# Altium PCB StationSolPortative.PcbDoc
Units mil, origin at the board's own origin, x right, y up, seen from the top; angles counter-clockwise.
Board outline 7255 x 4700 mil, 2 copper layers (Top Layer, Bottom Layer); 46 components, 53 nets, 270 pads, 23 vias.
Unrouted connection lines stored in the file: 8.
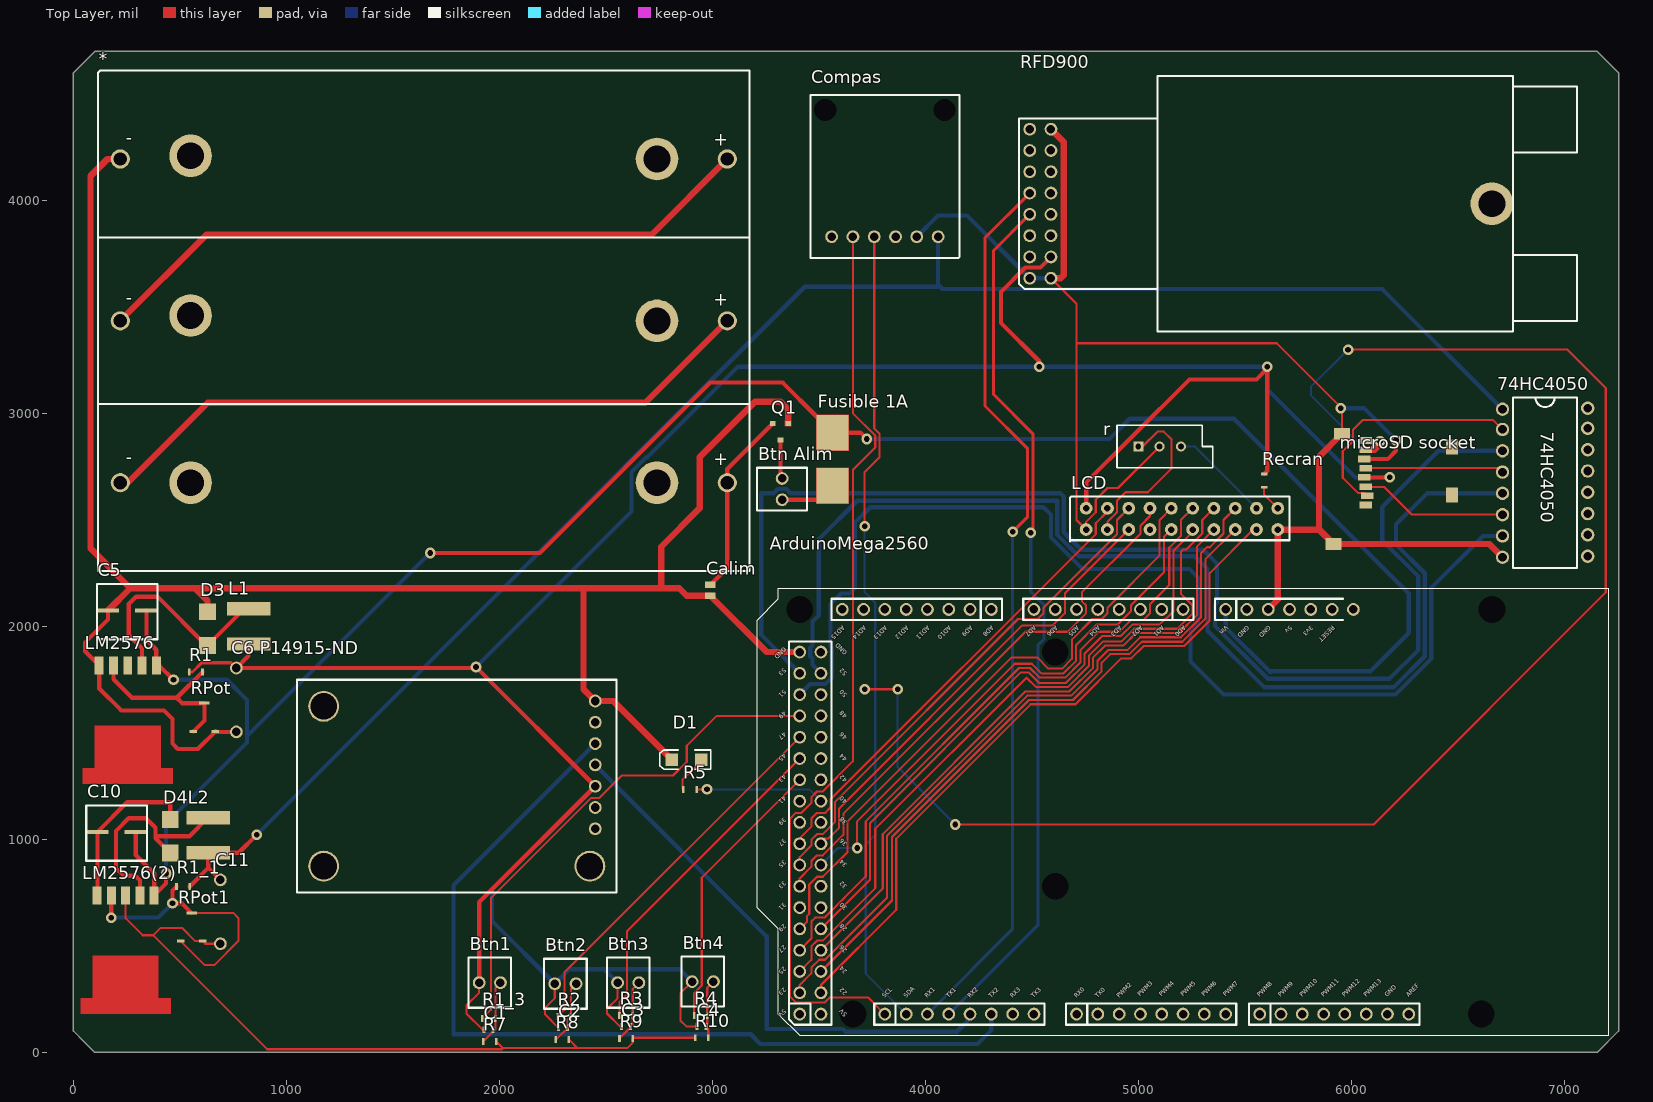
[diagram p0: Top Layer view]
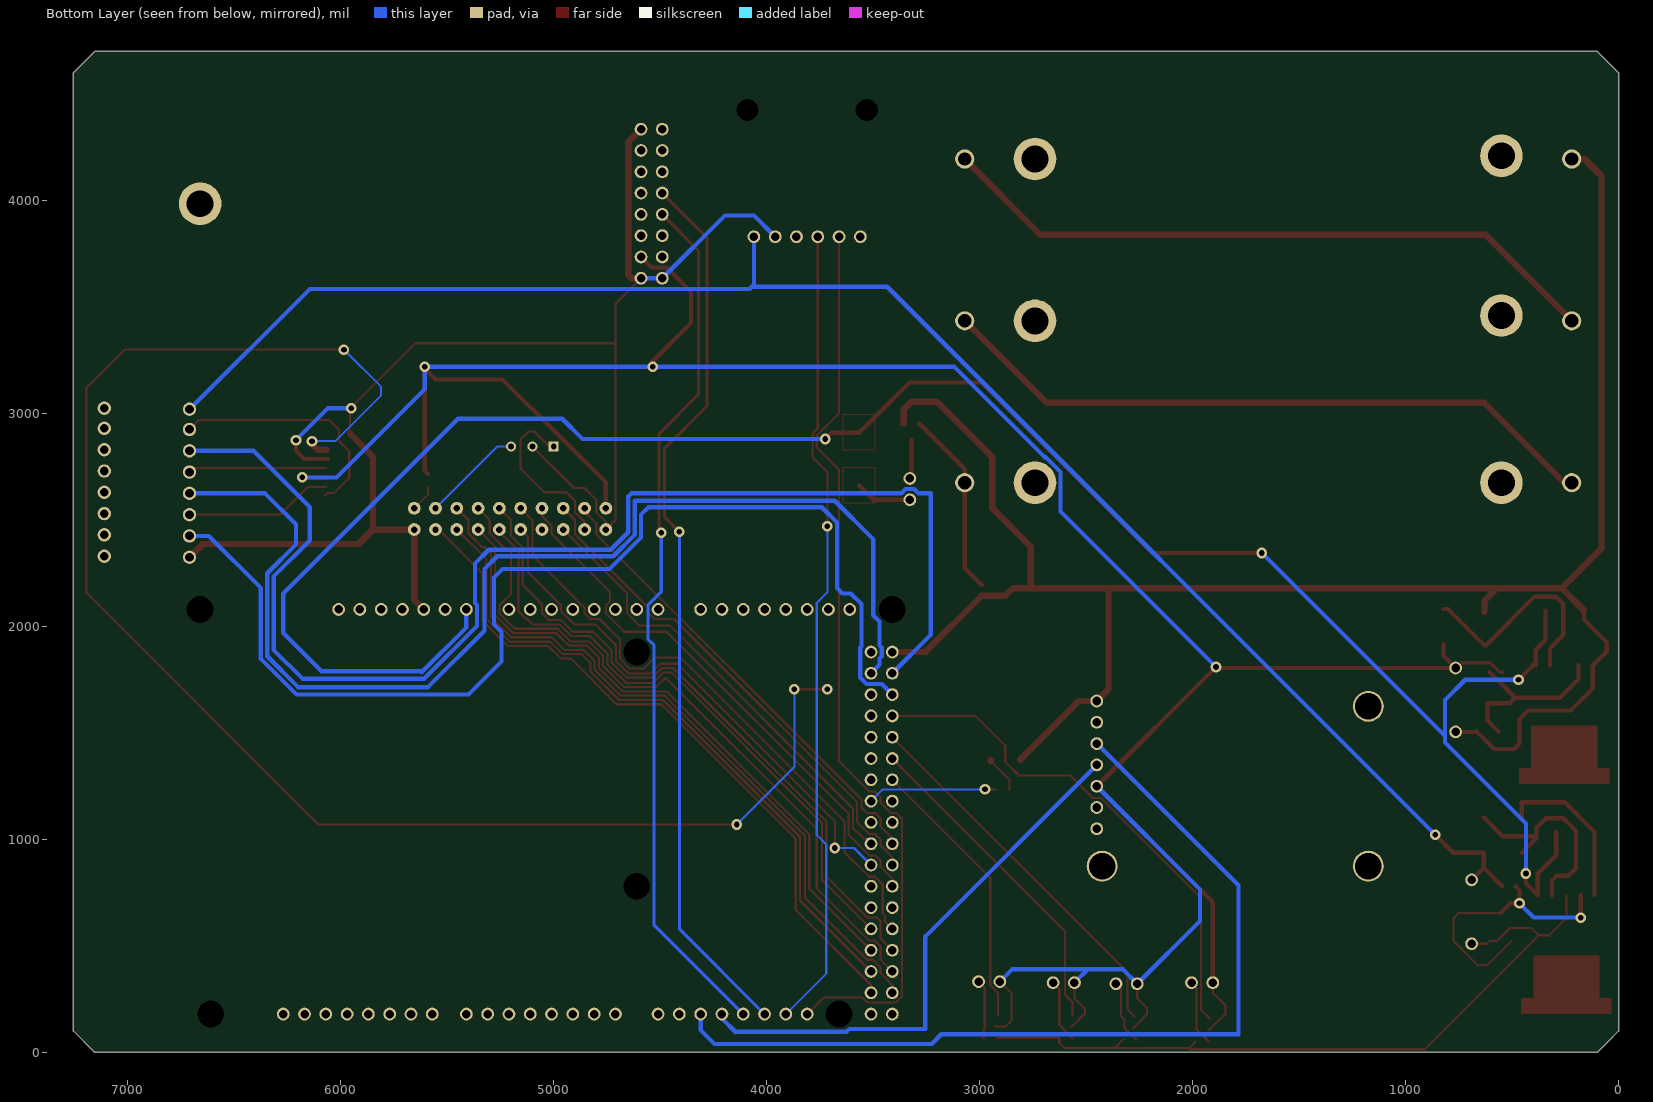
[diagram p1: Bottom Layer view, seen from below]

## Layer stack, top to bottom
Top Solder: solder mask 0.4, Solder Resist, Dk 3.5
Top Layer: signal copper 1.4
Dielectric1: dielectric 12.6, FR-4, Dk 4.8
Bottom Layer: signal copper 1.4
Bottom Solder: solder mask 0.4, Solder Resist, Dk 3.5

## Board outline
100,0 50,50 0,100 0,2095 0,4600 100,4700 7155,4700 7255,4600 7255,100 7155,0

## Design rules (kind name [scope] priority, off if disabled: settings)
Clearance [All] p1: gap=10
PolygonConnect [All] p1: connectstyle=Relief reliefconductorwidth=10 reliefentries=4 polygonreliefangle="90 Angle" airgapwidth=10
RoutingVias [All] p1: holewidth=28 width=50 viastyle="Through Hole" minholewidth=28 minwidth=50 maxholewidth=28 maxwidth=50
SolderMaskExpansion [All] p1: expansion=4
Width [All] p1: maxlimit=3000 minlimit=10 preferedwidth=20 minimp=50.000000 maximp=50.000000 favimp=50.000000
30 further rules are at their usual default settings.

## Classes and differential pairs
component class StationSolPortative: 74HC4050 * ArduinoMega2560 Btn1 Btn2 Btn3 Btn4 "Btn Alim" C1 C2 C3 C4 Calim Compas D1 "Fusible 1A" LCD "microSD socket" Q1 r R1_3 R2 R3 R4 R5 R7 R8 R9 R10 Recran RFD900
component class Alim: C5 "C6 P14915-ND" C10 C11 D3 D4 L1 L2 LM2576 LM2576(2) R1 R1_1 RPot RPot1

## Components (designator, comment, footprint, x,y, rotation, side; value= is the part's Value field where it differs from the comment)
74HC4050 "74HC4050" 74hc4050 6755,3080 r270 top
* "Batterie" BH-BK-18650-PC6-ND 3175,4610 r180 top
ArduinoMega2560 "ArduinoMega2560" ArduinoMega2560 9535,1830 r180 top
Btn1 "MAT100_2PINS" MTA100_2PINS 2055.04,210 r90 top
Btn2 "MAT100_2PINS" MTA100_2PINS 2410.04,205 r90 top
Btn3 "MAT100_2PINS" MTA100_2PINS 2705,210 r90 top
Btn4 "MAT100_2PINS" MTA100_2PINS 3055,215 r90 top
"Btn Alim" "MAT100_2PINS" MTA100_2PINS 3445,2745 r180 top
C1 "Cap Semi" "Capacité bouton" 1935,90 r0 top
C2 "Cap Semi" "Capacité bouton" 2285,100 r0 top
C3 "Cap Semi" "Capacité bouton" 2580,105 r0 top
C4 "Cap Semi" "Capacité bouton" 2935,105 r0 top
C5 "Cap Semi" "Condo alim 1" 395,2075 r90 top
"C6 P14915-ND" "Cap Semi" "Capacité alim 2" 765,1655 r90 top
C10 "Cap Semi" "Condo alim 1" 345,1035 r90 top
C11 "Cap Semi" "Capacité alim 2" 690,660 r90 top
Calim "Cap Semi" "capacitor Alim" 3015,2130 r90 top
Compas "HMC5883L" HMC5883L 3560,3830 r0 top
D1 "LED2" 3.2X1.6X1.1 2878.9,1375 r180 top
D3 "Diode" "Diode alim" 590,1990 r270 top
D4 "Diode" "Diode alim" 415,1015 r270 top
"Fusible 1A" "Header 2" "Fuse 1A" 3490,2910 r270 top
L1 "Inductor" "Inductance alim" 720,2000 r270 top
L2 "Inductor" "Inductance alim" 530,1020 r270 top
LCD "Header 20" "Connector écran" 5655,2555 r180 top
LM2576 "Header 5H" LM276 100,1775 r0 top
LM2576(2) "Header 5H" LM276 90,695 r0 top
"microSD socket" "microSD socket" "Carte SD" 6485,2310 r90 top
Q1 "MOSFET-P" NX2301 3320,2875 r0 top
r "RPot" VR5 5100,2845 r0 top
R1 "Res1" "470  and 4.7k Resistance" 550,1770 r0 top
R1_1 "Res1" "470  and 4.7k Resistance" 540,795 r180 top
R1_3 "470" "470  and 4.7k Resistance" 1975,175 r180 top
R2 "470" "470  and 4.7k Resistance" 2330,185 r180 top
R3 "470" "470  and 4.7k Resistance" 2620,190 r180 top
R4 "470" "470  and 4.7k Resistance" 2970,190 r180 top
R5 "Res1" "470  and 4.7k Resistance" 2920,1250 r180 top
R7 "4.7k" "470  and 4.7k Resistance" 1930,35 r0 top
R8 "4.7k" "470  and 4.7k Resistance" 2270,45 r0 top
R9 "4.7k" "470  and 4.7k Resistance" 2570,50 r0 top
R10 "4.7k" "470  and 4.7k Resistance" 2975,85 r180 top
Recran "Res3" "470  and 4.7k Resistance" 5575,2710 r270 top
RFD900 "Component_1" RFD900 6655,3990 r180 top
RPot "RPot" "Potentionmètre 50k" 615,1500 r0 top
RPot1 "RPot1" "Potentionmètre 50k" 555,515 r0 top
? "GPS" "PAM-7Q GPS" 2550,750 r90 top

## Footprints (in the part's own frame and the unit in brackets; to place one, negate y for a bottom-side part, rotate by r counter-clockwise, add the part's x,y. Pads: shape width x height; smd on the part's side, far side on the other; paste and mask are expansions set on the pad)
3.2X1.6X1.1 [mm] "SMT LED; 2 Flat Leads"
  rect 1.5x1.5 smd: 1(-1.75,0) 2(1.75,0)
  silkscreen extent -2.9,-1.15 3.2,1.15
74hc4050 [mil]
  round 62.99 hole 40: 1(60,-45) 2(155,-45) 3(255,-45) 4(355,-45) 5(455,-45) 6(555,-45) 7(655,-45) 8(755,-45) 9(750,355) 10(650,355) 11(550,355) 12(450,355) 13(350,355) 14(250,355) 15(150,355) 16(55,355)
  silkscreen extent 5,5 805,305
"470  and 4.7k Resistance" [mil]
  rect 12x32 smd: 1(-6,16) 2(56,16)
ArduinoMega2560 [mil]
  round 60 hole 40: 0(4825,1650) 1(4725,1650) 2(4625,1650) 3(4525,1650) 3.3V(3725,-250) 4(4425,1650) 5(4325,1650) 5V(3825,-250) 5V(6025,1650) 5V(6125,1650) 6(4225,1650) 7(4125,1650) 8(3965,1650) 9(3865,1650) 10(3765,1650) 11(3665,1650) 12(3565,1650) 13(3465,1650) 14(5025,1650) 15(5125,1650) 16(5225,1650) 17(5325,1650) 18(5425,1650) 19(5525,1650) 20(5625,1650) 21(5725,1650) 22(6025,1550) 23(6125,1550) 24(6025,1450) 25(6125,1450) 26(6025,1350) 27(6125,1350) 28(6025,1250) 29(6125,1250) 30(6025,1150) 31(6125,1150) 32(6025,1050) 33(6125,1050) 34(6025,950) 35(6125,950) 36(6025,850) 37(6125,850) 38(6025,750) 39(6125,750) 40(6025,650) 41(6125,650) 42(6025,550) 43(6125,550) 44(6025,450) 45(6125,450) 46(6025,350) 47(6125,350) 48(6025,250) 49(6125,250) 50(6025,150) 51(6125,150) 52(6025,50) 53(6125,50) A0(4325,-250) A1(4425,-250) A2(4525,-250) A3(4625,-250) A4(4725,-250) A5(4825,-250) A6(4925,-250) A7(5025,-250) A8(5225,-250) A9(5325,-250) A10(5425,-250) A11(5525,-250) A12(5625,-250) A13(5725,-250) A14(5825,-250) A15(5925,-250) AREF(3265,1650) GND(3365,1650) GND(3925,-250) GND(4025,-250) GND(6025,-50) GND(6125,-50) IOREF(3525,-250) RST(3625,-250) VIN(4125,-250)
  round 62.99 hole 125.98: 99(2875,-250) 99(2925,1650) 99(4925,-50) 99(4925,1050) 99(5875,1650) 99(6125,-250)
  silkscreen extent 2325,-350 6325,1750
BH-BK-18650-PC6-ND [mil] "Battery holder 3 cell 18650 lithium"
  round 200 hole 126: 0(435,1935) 0(435,1175) 0(435,415) 0(2625,1935) 0(2625,400) 0(2625,1150)
  round 90 hole 62: 1(105,415) 2(105,1175) 3(105,1935) 4(2955,415) 5(2955,1175) 6(2955,1935)
  silkscreen extent 0,0 3060,2350
"capacitor Alim" [mil]
  rect 30x50 smd: 1(15,25) 2(65,25)
"Capacité alim 2" [mil]
  round 60 hole 40: 1(-150,0) 2(150,0)
"Capacité bouton" [mil]
  rect 14x32 smd: 1(-7,16) 2(35,16)
"Carte SD" [mm]
  rect 0.8x1.5 smd: 1(6.606,10.595) 2(7.706,10.395) 3(8.806,10.595) 4(9.906,10.795) 5(11.006,10.595) 6(12.106,10.795) 7(13.206,10.595) 8(14.306,10.595)
  rect 1.8x1.4 smd: 9(13.506,0.295) 10(7.806,0.295)
  rect 1.4x1.9 smd: 11(1.956,14.445) 12(15.106,13.445)
"Condo alim 1" [mil]
  rect 20x105 smd: 1(0,232.5) 2(0,52.5)
  silkscreen extent -135,0 125,285
"Connector écran" [mil]
  round 60 hole 30: 1(0,0) 2(0,100) 3(100,0) 4(100,100) 5(200,0) 6(200,100) 7(300,0) 8(300,100) 9(400,0) 10(400,100) 11(500,0) 12(500,100) 13(600,0) 14(600,100) 15(700,0) 16(700,100) 17(800,0) 18(800,100) 19(900,0) 20(900,100)
  silkscreen extent -55,-55 975,155
"Diode alim" [mm]
  rect 2x2 smd: 1(-2,1) 2(2,1)
"Fuse 1A" [mil]
  rect 167x150 smd: 1(0,75) 2(248.5,75)
  Top Layer lines w1: 332,0 315,0 248.5,0 165,0 165,150 332,150 332,0 ; 83.5,0 0,0 -75,0 -83.5,0 -83.5,75 -83.5,150 0,150 83.5,150 83.5,0
HMC5883L [mil] "Compass"
  round 60 hole 40: 0(0,0) 1(100,0) 2(200,0) 3(300,0) 4(400,0) 5(500,0)
  round 60 hole 105: 10(-30,595) 11(530,595)
  silkscreen extent -100,-100 600,665
"Inductance alim" [mil]
  rect 63x205 smd: 1(-82.5,102.5) 2(82.5,102.5)
LM276 [mil]
  rect 42x85 smd: 1(289,42.5) 2(222,42.5) 3(155,42.5) 4(88,42.5) 5(21,42.5)
  Top Layer region: -57.5,-515.5 367.5,-515.5 367.5,-440.5 -57.5,-440.5
  Top Layer region: 0,-440.5 310,-440.5 310,-240.5 0,-240.5
MTA100_2PINS [mil]
  round 60 hole 40: 1(117.5,150) 2(117.5,50)
  silkscreen extent 0,0 235,200
NX2301 [mil]
  rect 27.54x23.6 smd: 1(0,0) 2(36.23,77.9) 3(-36.23,77.9)
  Top Layer lines w1: 22.46,66.4 22.46,77.9 22.46,90 36.23,90 50,90 50,77.9 50,66.4 36.23,66.4 24.73,66.4 22.46,66.4
"PAM-7Q GPS" [mil]
  round 60 hole 40: 0(900,100) 1(800,100) 2(700,100) 3(600,100) 4(500,100) 5(400,100) 6(300,100)
  round 145 hole 125: 7(125,1375) 7(125,125) 7(875,1375)
  silkscreen extent 0,0 1000,1500
"Potentionmètre 50k" [mil]
  rect 35x15 smd: 1(51.5,7.5) 3(-51.5,7.5)
  rect 50x15 smd: 2(0,140)
RFD900 [mil]
  round 200 hole 125.98: 0(-5,5)
  round 60 hole 40: 1(2165,355) 2(2065,355) 3(2165,255) 4(2065,255) 5(2165,155) 6(2065,155) 7(2165,55) 8(2065,55) 9(2165,-45) 10(2065,-45) 11(2165,-145) 12(2065,-145) 13(2165,-245) 14(2065,-245) 15(2165,-345) 16(2065,-345)
  silkscreen extent -405,-595 2215,605
VR5 [mm] "Thru-Hole; 3 Leads"
  rect 1.2x1.2 hole 0.7: 1(-2.54,0)
  round 1.2 hole 0.7: 2(0,0) 3(2.54,0)
  silkscreen extent -5.08,-2.54 6.35,2.54

## Part data
*: library part BH-BK-18650-PC6-ND
C1 C2 C3 C4 C5 "C6 P14915-ND" C10 C11 Calim: "Capacitor (Semiconductor SIM Model)"
Compas: "Compass"
D1: "Typical RED, GREEN, YELLOW, AMBER GaAs LED"
D3 D4: "Default Diode"
"Fusible 1A": "Header, 2-Pin"
LCD: "Header, 20-Pin"
LM2576 LM2576(2): "Header, 5-Pin, Right Angle"
Q1: "P-Channel MOSFET"
r RPot: "Potentiometer"
R1 R1_1 R5 Recran: "Resistor"
R1_3 R2 R3 R4 R7 R8 R9 R10: library part Res1, "Resistor"
RPot1: library part RPot, "Potentiometer"
?: library part "Pam-Q7 GPS"

## Via types
v1: diameter 50, hole 26.7, Top Layer to Bottom Layer, 23 vias

## Nets (pads, with @x,y where several pads share a name; then routed paths per layer and width w, separated by ;. In a path a pad name is that pad's centre, name@x,y a point inside that pad or via, vN(x,y) a via of type N, cw(c..) or ccw(c..) an arc to the next point about the centre after c; other vN are vias at no path point)
3.3V: 74HC4050.1 C11.2 Compas.5 L2.2 R1_1.1 | length 7931.2
  Top Layer w20: R1_1.1 632.5,865.5 632.5,867.5 ; C11.2 632.5,867.5 ; v1(860,1021.36) 776.14,937.5 L2.2 632.5,867.5
  Bottom Layer w20: v1(860,1021.36) 3433.64,3595 4070,3595 ; Compas.5 4060,3605 4070,3595 ; 74HC4050.1 6145,3585 4080,3585 4070,3595
5V: "C6 P14915-ND.2" "microSD socket.4" ?.4 Btn1.1 Btn2.1 Btn3.1 Btn4.1 C1.1 C2.1 C3.1 C4.1 L1.2 LCD.19 R1.1 Recran.1 RFD900.4 | length 14374.7
  Top Layer w10: Btn1.1 1905.04,280.04 1845,220 1845,182.72 1921.72,106 C1.1 ; Btn2.1 2260.04,255.04 2215,210 2215,177.72 2276.72,116 C2.1 ; Btn3.1 2555,255 2505,205 2505,182.72 2566.72,121 C3.1 ; Btn4.1 2850,277.5 2850,150 2879,121 C4.1
  Top Layer w15: R1.1 559.25,1786 603.25,1830 740,1830 765,1805
  Top Layer w20: L1.2 822.5,1862.5 765,1805 1895,1805 ?.4 1905.04,705.04 Btn1.1 ; v1(4535,3220) 4535,3245 4355,3425 4355,3570.71 4469.29,3685 4540,3685 RFD900.4 ; LCD.19 4755,2675.53 4968.09,2888.62 4968.62,2888.62 5240,3160 5555,3160 v1@5605,3210 ; Recran.1 5605,2730 v1@5605,3210 ; v1(5605,3220) v1@5605,3210 ; 6060,2700 v1@6170,2700
  Bottom Layer w20: v1(1890,1810) 2620,2540 2620,2724.71 2690.29,2795 2695,2795 3120,3220 v1(5605,3220) 5605,3115 6020,2700 v1(6180,2700) ; ?.4 1965,765 1965,617.54 Btn2.1 2327.54,390 2492.5,390 ; Btn3.1 2492.5,390 ; Btn4.1 2847.5,390 2492.5,390
ALIM: "Fusible 1A.1" ArduinoMega2560.VIN C5.2 C10.2 LM2576(2).1 LM2576.1 | length 10126.5
  Top Layer w20: C10.2 292.5,927.5 379,841 379,737.5 435,793.5 v1(435,840) ; C5.2 342.5,1937.5 389,1891 LM2576.1 402.5,1817.5 v1(470,1750) ; v1(1675,2345) 2190,2345 2990,3145 3330,3145 3490,2985 3565,2910 3640,2910 3695,2910 v1(3725,2880)
  Bottom Layer w20: v1(435,840) 435,1075 815,1455 815,1485 ; v1(470,1750) 720,1750 815,1655 815,1485 ; v1(1675,2345) 815,1485 ; v1(3725,2880) 4865,2880 4960,2975 5450,2975 6270,2155 6270,1970 6090,1790 5625,1790 5620,1785 5410,1995 ArduinoMega2560.VIN
B1: ArduinoMega2560.49 R1_3.2 | length 2430.4
  Top Layer w10: R1_3.2 1960,200 1960,723.64 2431.36,1195 2470,1195 2575,1300 2815.27,1300 2880,1364.73 2880,1440 3020,1580 ArduinoMega2560.49
B2: ArduinoMega2560.47 R2.2 | length 1781.5
  Top Layer w10: R2.2 2305.04,200.04 2305.04,375.04 ArduinoMega2560.47
B3: ArduinoMega2560.45 R3.2 | length 1556.4
  Top Layer w10: R3.2 2564,235.72 2600,271.72 2600,570 ArduinoMega2560.45
B4: ArduinoMega2560.43 R4.2 | length 1311.4
  Top Layer w10: R4.2 2914,277.86 2950,313.86 2950,820 ArduinoMega2560.43
"BTN ALIM": *.3 Calim.2 Q1.3 | length 879.6
  Top Layer w20: Calim.2 3070,2275 *.3 3070,2739.13 Q1.3
CS1: ArduinoMega2560.34 LCD.12 | length 2565.2
  Top Layer w10: v1(3680,960) 3680,1085 4420,1825 4500,1825 4545,1780 4648.58,1780 4707.99,1839.41 4707.99,1912.99 4805,2010 4905,2010 4965,2070 4965,2098.64 5120,2253.64 5120,2420 LCD.12
  Bottom Layer w10: ArduinoMega2560.34 3590,960 v1(3680,960)
CS2: ArduinoMega2560.33 LCD.13 | length 2605.3
  Top Layer w10: ArduinoMega2560.33 3410,816.36 3465,871.36 3465,898.64 3491.36,925 3518.64,925 3615,1021.36 3615,1120 4470,1975 4668.64,1975 4755,2061.36 4755,2098.64 4735,2118.64 4735,2160 5010,2435 5010,2473.64 5055,2518.64 LCD.13
D0: ArduinoMega2560.22 LCD.4 | length 3292.6
  Top Layer w10: ArduinoMega2560.22 3510,316.36 3863.28,669.64 3863.28,1003.28 4495,1635 4705,1635 4920,1850 4966.57,1850 5024.93,1908.36 5215.13,1908.36 5335,2028.22 5335,2250 LCD.4@5540,2455
  Top Layer w30: LCD.4@5540,2455 LCD.4
D1: ArduinoMega2560.23 LCD.5 | length 3431.3
  Top Layer w10: ArduinoMega2560.23 3410,316.36 3465,371.36 3465,398.64 3501.36,435 3528.64,435 3820,726.36 3820,1016.72 4478.28,1675 4685,1675 4807.99,1797.99 4807.99,1837.99 4860,1890 4950,1890 5009.22,1949.22 5199.42,1949.22 5295,2044.79 5295,2345 5321.72,2371.72 5335.36,2371.72 5400,2436.36 5400,2500 LCD.5
D2: ArduinoMega2560.24 LCD.6 | length 3165.9
  Top Layer w10: ArduinoMega2560.24 3843.28,713.28 3843.28,1011.72 4486.57,1655 4693.29,1655 4827.99,1789.71 4827.99,1829.71 4868.28,1870 4958.28,1870 5016.64,1928.36 5206.85,1928.36 5315,2036.51 5315,2315 LCD.6
D3: ArduinoMega2560.25 LCD.7 | length 3396.2
  Top Layer w10: ArduinoMega2560.25 3465,435 3465,498.64 3491.36,525 3518.64,525 3765,771.36 3765,1050 4475,1760 4520,1715 4668.43,1715 4767.99,1814.56 4767.99,1862.99 4835,1930 4921.57,1930 4980.78,1989.22 5182.86,1989.22 5255,2061.36 5255,2098.64 5200,2153.64 5200,2350 5211.72,2361.72 5225.36,2361.72 5300,2436.36 5300,2500 LCD.7
D4: ArduinoMega2560.26 LCD.8 | length 3029.4
  Top Layer w10: ArduinoMega2560.26 3800,770 3800,1025 4470,1695 4676.72,1695 4787.99,1806.27 4787.99,1854.71 4843.28,1910 4929.85,1910 4989.07,1969.22 5191.14,1969.22 5275,2053.08 5275,2375 LCD.8
D5: ArduinoMega2560.27 LCD.9 | length 3145.5
  Top Layer w10: ArduinoMega2560.27 3465,535 3465,615 3483.08,633.08 3526.72,633.08 3720,826.36 3720,1085 4440,1805 4491.72,1805 4536.72,1760 4656.87,1760 4727.99,1831.13 4727.99,1887.99 4815,1975 4910,1975 4965,2030 5023.64,2030 5055,2061.36 5055,2105 5145,2195 5145,2370 5200,2425 5200,2500 LCD.9
D6: ArduinoMega2560.28 LCD.10 | length 2920
  Top Layer w10: ArduinoMega2560.28 3740,810 3740,1076.72 4447.5,1784.22 4484.22,1784.22 4533.43,1735 4660.15,1735 4747.99,1822.84 4747.99,1872.99 4830,1955 4918.28,1955 4973.28,2010 5100,2010 5125,2035 5128.64,2035 5165,2071.36 5165,2355 5255,2445 LCD.10
D7: ArduinoMega2560.29 LCD.11 | length 2953.3
  Top Layer w10: ArduinoMega2560.29 3445,615 3445,641.36 3455,651.36 3455,788.64 3491.36,825 3518.64,825 3635,941.36 3635,1085 4405,1855 4524.7,1855 4577.69,1802.01 4642.31,1802.01 4687.99,1847.69 4687.99,1937.99 4785,2035 4828.64,2035 4855,2061.36 4855,2088.64 5100,2333.64 5100,2500 LCD.11
E: ArduinoMega2560.37 LCD.17 | length 2196.2
  Top Layer w10: ArduinoMega2560.37 3410,1005 3465,1060 3465,1098.64 3491.36,1125 3530,1125 3555,1150 3555,1188.64 4800,2433.64 4800,2485 LCD.17@4855,2540
  Top Layer w30: LCD.17@4855,2540 LCD.17
FB: LM2576.4 R1.2 RPot.2 RPot.3 | length 863.8
  Top Layer w20: LM2576.4 188,1752 275,1665 485,1665 ; RPot.3 615,1559 RPot.2 510,1640 485,1665 ; R1.2 485,1665
FB1: LM2576(2).4 R1_1.2 RPot1.2 RPot1.3 | length 1316.3
  Top Layer w10: RPot1.3 616,410 660.71,410 775,524.29 775,630 750,655 RPot1.2
  Top Layer w20: v1(178,633) 178,737.5 ; R1_1.2 465,760 v1(465,700) 510,700 RPot1.2
  Bottom Layer w20: v1(178,633) 398,633 v1(465,700)
GND: 74HC4050.8 "C6 P14915-ND.1" "microSD socket.6" "microSD socket.11" "microSD socket.12" *.4 ?.0 ArduinoMega2560.GND C5.1 C10.1 C11.1 Calim.1 Compas.4 D1.2 D3.1 D4.1 LCD.2 LCD.20 LM2576(2).3 LM2576(2).5 LM2576.3 LM2576.5 Q1.2 R7.2 R8.2 R9.2 R10.2 r.2 RFD900.1 RFD900.2 RFD900.16 RPot1.1 RPot.1 | length 21077.3
  Top Layer w10: 245,737.5 245,630 325,550 375,550 ; C11.1 619,510 RPot1.1 572.5,522.5 510,585 410,585 375,550 ; R7.2 2017,20 ; R8.2 2367,20 ; R10.2 2629,69 R9.2 2626,46 2600,20 2367,20 ; RFD900.2 4710,3515 4710,3330 ; r.2 4905,2650 4855,2650 4800,2595 4800,2536.36 4755,2491.36 LCD.20 4710,2500 4710,3330 ; 5955.67,2904.72 5955.67,3024.33 5650,3330 4710,3330 ; 375,550 910,15 2012,15 2017,20 ; 2017,20 2367,20
  Top Layer w20: 112.5,739 C10.1 252.5,1175 454.37,1175 D4.1 ; C5.1 162.5,2032.5 55,1925 55,1883.5 LM2576.5 121,1709 225,1605 425,1605 465,1565 465,1450 490,1425 585,1425 585,1426 RPot.1 669,1505 765,1505 ; 6060,2786.61 6171.61,2786.61 6210,2825 v1(6210,2875)
  Top Layer w30: C5.1 267.5,2180 ; *.4 160,4195 80,4115 80,2367.5 267.5,2180 ; D3.1 629.37,2120.63 570,2180 ; D1.2 2535,1650 ?.0 2395,1705 2395,2180 ; Q1.2 3356.23,2965 3356.23,3018.77 3320,3055 3200,3055 2940,2795 2940,2555 2760,2375 2760,2180 ; ArduinoMega2560.GND@3410,1880 3255,1880 Calim.1 2880,2145 2845,2180 2760,2180 ; RFD900.2 4635,3635 4650,3650 4650,4275 RFD900.16 ; ArduinoMega2560.GND@5610,2080 5655,2125 LCD.2 5848.31,2455 ; 5955.67,2904.72 5848.31,2797.36 5848.31,2455 ; 74HC4050.8 6647.99,2387.01 5916.3,2387.01 5848.31,2455 ; 267.5,2180 570,2180 ; 570,2180 2395,2180 ; 2395,2180 2760,2180
  Bottom Layer w20: Compas.4 4060,3930 4195,3930 RFD900.1 RFD900.2 ; v1(5950,3025) 6060,3025 v1(6210,2875)
"MEGA CS": 74HC4050.3 ArduinoMega2560.53 | length 6136.2
  Bottom Layer w20: ArduinoMega2560.53 3230,1960 3230,2625 3286.79,2625 3306.79,2645 3348.21,2645 3368.21,2625 4635,2625 4650,2610 4650,2442.43 4732.43,2360 5305,2360 5370,2295 5370,2110.71 5360,2100.71 5360,2002.57 5607.57,1755 6180,1755 6315,1890 6315,2235 6145,2405 6145,2560 6410,2825 74HC4050.3
MISO: "microSD socket.7" ArduinoMega2560.50 | length 7454
  Top Layer w10: v1@3700,1705 v1(3870,1705) ; v1(4140,1070) 6105,1070 7195,2160 7195,3120 7015,3300 v1(5985,3300)
  Top Layer w30: 6067.87,2829.92 6109.92,2829.92 v1@6145,2865
  Bottom Layer w10: v1(3870,1705) 3870,1340 v1(4140,1070) ; v1@5980,3295 5810,3125 5810,3085 6025,2870 v1(6135,2870)
  other v1: 3715,1705
MOSI: 74HC4050.7 ArduinoMega2560.51 | length 5266.5
  Bottom Layer w20: ArduinoMega2560.51 3460,1730 3530.71,1730 3560,1759.29 3560,1900.71 3555,1905.71 3555,2105 3605,2155 3645,2155 3670,2180 3670,2488.64 3741.36,2560 4555,2560 4590,2525 4590,2417.57 4737.57,2270 5240,2270 5280,2230 5280,2010 5245,1975 5245,1835 5400,1680 6207.43,1680 6375,1847.57 6375,2180 6620,2425 74HC4050.7
Net*_1: *.1 *.5 | length 3164.8
  Top Layer w30: *.5 625,3840 2715,3840 *.1
Net*_2: *.2 *.6 | length 3164.8
  Top Layer w20: *.6 *.6@255,2675
  Top Layer w30: *.6@255,2675 630,3050 2685,3050 *.2
NetArduinoMega2560_40: ArduinoMega2560.40 R5.1 | length 607.2
  Top Layer w10: R5.1 2974,1234 v1(2975,1235)
  Bottom Layer w10: v1(2975,1235) 3455,1235 ArduinoMega2560.40
NetBtn1_2: Btn1.2 C1.2 R1_3.1 R7.1 | length 310.2
  Top Layer w10: R7.1 1924.28,51 1981,107.72 R1_3.1 1981,303.46 Btn1.2
NetBtn2_2: Btn2.2 C2.2 R2.1 R8.1 | length 303.2
  Top Layer w10: R8.1 2267.21,61 2320,113.79 C2.2 2320,153 R2.1 2336,298.46 Btn2.2
NetBtn3_2: Btn3.2 C3.2 R3.1 R9.1 | length 299.2
  Top Layer w10: R9.1 2615,117 C3.2 2626,132 R3.1 2626,298.5 Btn3.2
NetBtn4_2: Btn4.2 C4.2 R4.1 R10.1 | length 282.6
  Top Layer w10: R10.1 2981,110 C4.2 2976,127 R4.1 2976,303.5 Btn4.2
"NetBtn Alim_1": "Btn Alim.1" "Fusible 1A.2" | length 265
  Top Layer w20: 3327.5,2595 3490,2595 3498.5,2595 3565,2661.5
"NetBtn Alim_2": "Btn Alim.2" Q1.1 | length 183.1
  Top Layer w20: Q1.1 3320,2702.5 3327.5,2695
NetD1_1: D1.1 R5.2 | length 179
  Top Layer w10: R5.2 2860,1238 2860,1280 D1.1@2947.8,1367.8
  Top Layer w30: D1.1@2947.8,1367.8 D1.1
OUT: D3.2 L1.1 LM2576.2 | length 1055.9
  Top Layer w20: LM2576.2 322,1898 260,1960 260,2105 295,2140 395,2140 623.74,1911.26 D3.2 800.61,2082.5 L1.1
OUT1: D4.2 L2.1 LM2576(2).2 | length 1041.2
  Top Layer w20: 312,737.5 312,808 290,830 235,830 200,865 200,1040 260,1100 340.63,1100 340.63,1099.37 385,1055 385,1015 ; D4.2 385,1005.63 385,1015 ; L2.1 545,1015 385,1015
"OUT CS": 74HC4050.2 "microSD socket.2" | length 1135.7
  Top Layer w10: 6075.75,2613.38 6063.19,2625.94 6032.13,2625.94 5960,2698.08 5960,2822.88 6008.07,2870.95 6008.07,2923.07 6055,2970 6665,2970 74HC4050.2
"OUT MOSI": 74HC4050.6 "microSD socket.3" | length 696.7
  Top Layer w10: 6067.87,2656.69 6069.57,2655 6155,2655 6285,2525 6420,2525 74HC4050.6
"OUT SCK": 74HC4050.4 "microSD socket.5" | length 649.7
  Top Layer w10: 6067.87,2743.31 6691.69,2743.31 74HC4050.4
R/W: ArduinoMega2560.35 LCD.15 | length 2385.8
  Top Layer w10: ArduinoMega2560.35 3410,916.36 3465,971.36 3465,998.64 3491.36,1025 3518.64,1025 3575,1081.36 3575,1175 4435,2035 4528.64,2035 4555,2061.36 4555,2088.64 4900,2433.64 4900,2500 LCD.15
RS: ArduinoMega2560.36 LCD.16 | length 2178.2
  Top Layer w10: ArduinoMega2560.36 3510,1005 3545,1005 3595,1055 3595,1145 4455,2005 4598.64,2005 4655,2061.36 4655,2155 LCD.16
RST: LCD.14
RX1: ArduinoMega2560.19 RFD900.9 | length 4219.5
  Top Layer w15: v1(4410,2445) 4480,2515 4480,2835 4280,3035 4280,3825 RFD900.9
  Bottom Layer w15: ArduinoMega2560.19 4410,580 v1(4410,2445)
RX2: ?.3 ArduinoMega2560.17 | length 2581.6
  Bottom Layer w20: ?.3 3255,545 3255,110 3612.63,110 3625.62,97.01 4142.99,97.01 4145,95 4210,160 ArduinoMega2560.17
"SCK MEGA": 74HC4050.5 ArduinoMega2560.52 | length 5508.9
  Bottom Layer w20: ArduinoMega2560.52 3470,1820 3470,1849.29 3460,1859.29 3460,1900.71 3470,1910.71 3470,2022.63 3500,2052.63 3500,2410 3680,2590 4620,2590 4620,2430 4720,2330 5265,2330 5325,2270 5325,1980 5590,1715 6200,1715 6345,1860 6345,2250 6210,2385 6210,2480 6355,2625 74HC4050.5
SCL: ArduinoMega2560.21 Compas.1 | length 4307.5
  Top Layer w10: Compas.1 3660,3001.57 3765,2896.57 3765,2840 3660,2735 3660,1366.36 3518.64,1225 3491.36,1225 3465,1198.64 3465,1171.36 3418.64,1125 3391.36,1125 3365,1098.64 3365,261.36 3391.36,235 3528.64,235 3551.63,257.99 3732.01,257.99 ArduinoMega2560.21
SDA: ArduinoMega2560.20 Compas.2 | length 3807.4
  Top Layer w10: v1(3715,2470) 3715,2725 3785,2795 3785,2904.85 3760,2929.85 Compas.2
  Bottom Layer w10: v1(3715,2470) 3715,2160 3765,2110 3765,1021.57 3720,976.57 3720,370 ArduinoMega2560.20
TX1: ArduinoMega2560.18 RFD900.7 | length 4123.3
  Top Layer w15: RFD900.7 4320,3765 4320,3090 4505,2905 v1@4505,2430
  Bottom Layer w15: ArduinoMega2560.18 4529.51,599.51 4529.51,1913.34 4557.5,1941.33 4557.5,2099.68 4495,2162.18 v1(4495,2440)
TX2: ?.2 ArduinoMega2560.16 | length 4286
  Bottom Layer w20: ?.2 1785,785 1785,85 3180,85 3225,40 4245,40 4310,105 ArduinoMega2560.16
VEE: LCD.18 r.1 | length 809.3
  Top Layer w10: LCD.18 4855,2491.36 4900,2536.36 4900,2590 4940,2630 5045,2630 5155,2740 5155,2880 5120,2915 5090,2915 5020,2845 r.1
VO: LCD.3 r.3 | length 475.1
  Bottom Layer w10: r.3 5265,2845 LCD.3
VSS: LCD.1 Recran.2 | length 125.5
  Top Layer w10: Recran.2 5591,2619 LCD.1
pads on no net: 74HC4050.9 74HC4050.10 74HC4050.11 74HC4050.12 74HC4050.13 74HC4050.14 74HC4050.15 74HC4050.16 "microSD socket.1" "microSD socket.8" "microSD socket.9" "microSD socket.10" *.0 ?.1 ?.5 ?.6 ?.7 ArduinoMega2560.0 ArduinoMega2560.1 ArduinoMega2560.2 ArduinoMega2560.3 ArduinoMega2560.3.3V ArduinoMega2560.4 ArduinoMega2560.5 ArduinoMega2560.5V ArduinoMega2560.6 ArduinoMega2560.7 ArduinoMega2560.8 ArduinoMega2560.9 ArduinoMega2560.10 ArduinoMega2560.11 ArduinoMega2560.12 ArduinoMega2560.13 ArduinoMega2560.14 ArduinoMega2560.15 ArduinoMega2560.30 ArduinoMega2560.31 ArduinoMega2560.32 ArduinoMega2560.38 ArduinoMega2560.39 ArduinoMega2560.41 ArduinoMega2560.42 ArduinoMega2560.44 ArduinoMega2560.46 ArduinoMega2560.48 ArduinoMega2560.99 ArduinoMega2560.A0 ArduinoMega2560.A1 ArduinoMega2560.A2 ArduinoMega2560.A3 ArduinoMega2560.A4 ArduinoMega2560.A5 ArduinoMega2560.A6 ArduinoMega2560.A7 ArduinoMega2560.A8 ArduinoMega2560.A9 ArduinoMega2560.A10 ArduinoMega2560.A11 ArduinoMega2560.A12 ArduinoMega2560.A13 ArduinoMega2560.A14 ArduinoMega2560.A15 ArduinoMega2560.AREF ArduinoMega2560.IOREF ArduinoMega2560.RST Compas.0 Compas.3 Compas.10 Compas.11 RFD900.0 RFD900.3 RFD900.5 RFD900.6 RFD900.8 RFD900.10 RFD900.11 RFD900.12 RFD900.13 RFD900.14 RFD900.15

## Text inside footprints (layer, text, board x,y; h text height)
*: Top Overlay "+" at 3075,4310 h60 r180; Top Overlay "-" at 275,4310 h60 r180; Top Overlay "+" at 3075,3560 h60 r180; Top Overlay "+" at 3075,2810 h60 r180; Top Overlay "-" at 275,3560 h60 r180; Top Overlay "-" at 275,2810 h60 r180
ArduinoMega2560: Top Overlay "RESET" at 5910,2005 h20 r225; Top Overlay "3v3" at 5810,2005 h20 r225; Top Overlay "5v" at 5710,2005 h20 r225; Top Overlay "GND" at 5610,2005 h20 r225; Top Overlay "GND" at 5510,2005 h20 r225; Top Overlay "Vin" at 5410,2005 h20 r225; Top Overlay "AD0" at 5210,2005 h20 r225; Top Overlay "AD1" at 5110,2005 h20 r225; Top Overlay "AD2" at 5010,2005 h20 r225; Top Overlay "AD3" at 4910,2005 h20 r225; Top Overlay "AD4" at 4810,2005 h20 r225; Top Overlay "AD5" at 4710,2005 h20 r225; Top Overlay "AD6" at 4610,2005 h20 r225; Top Overlay "AD7" at 4510,2005 h20 r225; Top Overlay "AD8" at 4310,2005 h20 r225; Top Overlay "AD9" at 4210,2005 h20 r225; Top Overlay "AD10" at 4110,2005 h20 r225; Top Overlay "AD11" at 4010,2005 h20 r225; Top Overlay "AD12" at 3910,2005 h20 r225; Top Overlay "AD13" at 3810,2005 h20 r225; Top Overlay "AD14" at 3710,2005 h20 r225; Top Overlay "AD15" at 3610,2005 h20 r225; Top Overlay "RX0" at 4710,255 h20 r45; Top Overlay "SCL" at 3810,255 h20 r45; Top Overlay "5V" at 3635,180 h20 r135; Top Overlay "22" at 3635,280 h20 r135; Top Overlay "24" at 3635,380 h20 r135; Top Overlay "26" at 3635,480 h20 r135; Top Overlay "28" at 3635,580 h20 r135; Top Overlay "30" at 3635,680 h20 r135; Top Overlay "32" at 3635,780 h20 r135; Top Overlay "34" at 3635,880 h20 r135; Top Overlay "36" at 3635,980 h20 r135; Top Overlay "38" at 3635,1080 h20 r135; Top Overlay "40" at 3635,1180 h20 r135; Top Overlay "42" at 3635,1280 h20 r135; Top Overlay "44" at 3635,1380 h20 r135; Top Overlay "46" at 3635,1480 h20 r135; Top Overlay "48" at 3635,1580 h20 r135; Top Overlay "52" at 3635,1780 h20 r135; Top Overlay "GND" at 3635,1880 h20 r135; Top Overlay "50" at 3635,1680 h20 r135; Top Overlay "5V" at 3335,205 h20 r225; Top Overlay "23" at 3335,305 h20 r225; Top Overlay "25" at 3335,405 h20 r225; Top Overlay "27" at 3335,505 h20 r225; Top Overlay "29" at 3335,605 h20 r225; Top Overlay "31" at 3335,705 h20 r225; Top Overlay "33" at 3335,805 h20 r225; Top Overlay "35" at 3335,905 h20 r225; Top Overlay "37" at 3335,1005 h20 r225; Top Overlay "39" at 3335,1105 h20 r225; Top Overlay "41" at 3335,1205 h20 r225; Top Overlay "43" at 3335,1305 h20 r225; Top Overlay "45" at 3335,1405 h20 r225; Top Overlay "47" at 3335,1505 h20 r225; Top Overlay "49" at 3335,1605 h20 r225; Top Overlay "51" at 3335,1705 h20 r225; Top Overlay "53" at 3335,1805 h20 r225; Top Overlay "GND" at 3335,1905 h20 r225; Top Overlay "SDA" at 3910,255 h20 r45; Top Overlay "RX1" at 4010,255 h20 r45; Top Overlay "TX1" at 4110,255 h20 r45; Top Overlay "RX2" at 4210,255 h20 r45; Top Overlay "TX2" at 4310,255 h20 r45; Top Overlay "RX3" at 4410,255 h20 r45; Top Overlay "TX3" at 4510,255 h20 r45; Top Overlay "TX0" at 4810,255 h20 r45; Top Overlay "PWM2" at 4910,255 h20 r45; Top Overlay "PWM3" at 5010,262.07 h20 r45; Top Overlay "PWM4" at 5110,262.07 h20 r45; Top Overlay "PWM5" at 5210,262.07 h20 r45; Top Overlay "PWM6" at 5310,262.07 h20 r45; Top Overlay "PWM7" at 5410,262.07 h20 r45; Top Overlay "PWM8" at 5570,260 h20 r45; Top Overlay "PWM9" at 5670,260 h20 r45; Top Overlay "PWM10" at 5770,260 h20 r45; Top Overlay "PWM11" at 5870,260 h20 r45; Top Overlay "PWM12" at 5970,260 h20 r45; Top Overlay "PWM13" at 6070,260 h20 r45; Top Overlay "GND" at 6170,260 h20 r45; Top Overlay "AREF" at 6270,260 h20 r45